# EAGLE board AudioBoard (EAGLE 6.2)
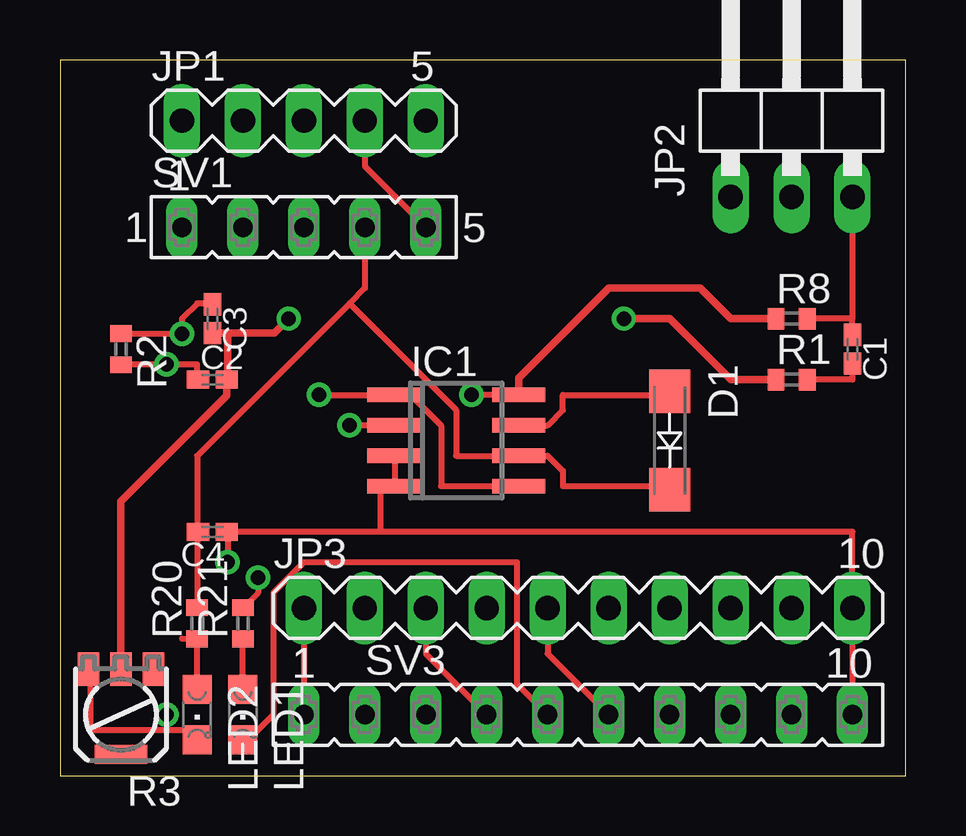
[diagram p0: board, top side]
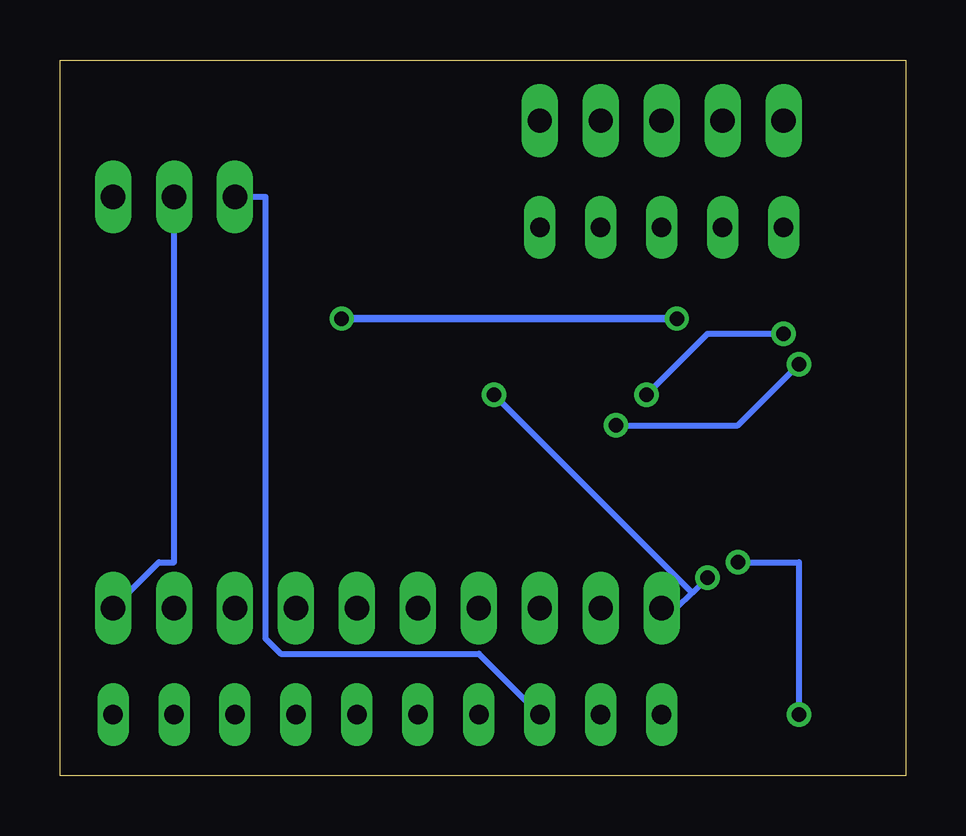
[diagram p1: board, bottom side, seen from below]

Size 35.23 x 29.84 mm. Coordinates in mm from the lower left corner, seen from the top.
Outline: 0,0 35.23,0 35.23,29.84 0,29.84 0,0
Copper layers (1*16): Top 0.035mm / dielectric 1.5mm / Bottom 0.035mm
Design rules: minimum track width 10mil, minimum drill 24mil, track to track 8mil, track to pad 8mil, pad to pad 8mil, via to via 8mil, smd to smd 8mil, copper to edge 40mil, drill to drill 8mil, minimum pad ring 10mil, minimum via ring 8mil, stop-mask expansion 4mil, vias tented up to drill 0mil, thermal gap 10mil

## Footprints (pad centres in the part's own frame; a part is rotated, then mirrored left to right if it is on the bottom)
C0402K = smd 0.925 x 0.74: 1 -0.6,0; 2 0.6,0
SMA-DO214AC = smd 1.8 x 1.7: A -2.05,0; K 2.05,0
SO08 = smd 0.6 x 2.2: 1 -1.905,-2.6; 2 -0.635,-2.6; 3 0.635,-2.6; 4 1.905,-2.6; 5 1.905,2.6; 6 0.635,2.6; 7 -0.635,2.6; 8 -1.905,2.6
MA05-1 = drill 1.016 long: 1 -5.08,0; 2 -2.54,0; 3 0,0; 4 2.54,0; 5 5.08,0
1X03/90 = drill 1.016 long: 1 -2.54,-3.81; 2 0,-3.81; 3 2.54,-3.81
MA10-1 = drill 1.016 long: 1 -11.43,0; 2 -8.89,0; 3 -6.35,0; 4 -3.81,0; 5 -1.27,0; 6 1.27,0; 7 3.81,0; 8 6.35,0; 9 8.89,0; 10 11.43,0
CHIPLED_0805 = smd 1.2 x 1.2: A 0,-1.05; C 0,1.05
R0402 = smd 0.7 x 0.9: 1 -0.65,0; 2 0.65,0
PC25 = smd 2.2 x 0.8: 4 0,1.65 | smd 0.9 x 1.4: A -1.35,-1.9; E 1.35,-1.9; S 0,-1.9
FE05-1 = drill 0.813 long: 1 -5.08,0; 2 -2.54,0; 3 0,0; 4 2.54,0; 5 5.08,0
FE10 = drill 0.813 long: 1 -11.43,0; 2 -8.89,0; 3 -6.35,0; 4 -3.81,0; 5 -1.27,0; 6 1.27,0; 7 3.81,0; 8 6.35,0; 9 8.89,0; 10 11.43,0

## Placement (x,y rotation side)
C1  [C0402K]  33.02,17.78 270 top
C2  [C0402K]  6.35,16.51 0 top
C3  [C0402K]  6.35,19.05 270 top
C4  [C0402K]  6.35,10.16 180 top
D1  GF1  [SMA-DO214AC]  25.4,13.97 270 top
IC1  LM4558D  [SO08]  16.51,13.97 270 top
JP1  [MA05-1]  10.16,27.3 0 top
JP2  [1X03/90]  30.48,27.94 0 top
JP3  [MA10-1]  21.59,6.98 0 top
LED1  [CHIPLED_0805]  7.62,2.54 180 top
LED2  [CHIPLED_0805]  5.72,2.54 180 top
R1  [R0402]  30.48,16.51 0 top
R2  [R0402]  2.54,17.78 270 top
R3  [PC25]  2.54,2.54 180 top
R8  [R0402]  30.48,19.05 0 top
R20  [R0402]  5.72,6.35 90 top
R21  [R0402]  7.62,6.35 90 top
SV1  [FE05-1]  10.16,22.86 0 top
SV3  [FE10]  21.59,2.54 0 top

## Library data of the parts
C1-C4 R1 R2 R8 R20 R21 = rcl
D1 = diode
IC1 = linear
JP1 JP3 = con-lstb; OC_FARNELL: unknown; OC_NEWARK: unknown
JP2 = pinhead
LED1 LED2 = led
R3 = pot-vitrohm; MF: CLAROSTAT; MPN: 308NPC25KS; OC_FARNELL: 1440998; OC_NEWARK: 03F7518
SV1 SV3 = con-lsta; OC_FARNELL: unknown; OC_NEWARK: unknown

## Nets
+3V3: IC1.8 JP3.1 R8.1 R21.2 SV3.1
GND: C4.1 IC1.3 IC1.4 JP2.2 JP3.10 LED2.C R3.E SV3.10
N$1: LED1.C SV3.5
N$2: LED1.A R21.1
N$3: LED2.A R20.1
N$4: JP3.5 SV3.6
N$5: C2.2 C3.2 R1.1 R3.S
N$6: C2.1 IC1.2 R2.2
N$7: C3.1 IC1.1 IC1.5 R2.1
N$8: C1.2 R1.2
N$9: JP3.3 SV3.4
N$10: C1.1 JP2.3 R8.2
N$11: C4.2 D1.K IC1.6 R20.2 SV1.4
N$12: JP1.4 SV1.5
N$13: D1.A IC1.7
N$14: JP2.1 SV3.3

## Tracks (layer width: path | path; a pad name or v marks a point on that pad's centre or on a via)
+3V3  (via drill 0.61)
  Top 0.254: JP3.1 SV3.1 | v8.25,8.25 8.25,7.62 7.62,6.98 R21.2 | IC1.8 v17.14,15.88 | 29.84,19.05 R8.1
  Top 0.305: R8.1 27.94,19.05 26.67,20.32 22.86,20.32 19.11,16.57 IC1.8
  Bottom 0.254: 8.89,7.62 9.52,6.98 JP3.1 | 8.89,7.62 v8.25,8.25 | v17.14,15.88 8.89,7.62
GND  (via drill 0.61)
  Top 0.254: SV3.10 JP3.10 33.02,10.16 13.34,10.16 | IC1.3 13.97,13.34 13.97,12.06 IC1.4 13.34,12.06 13.34,10.16 | 4.45,1.91 1.27,1.91 1.27,3.81 R3.E | 4.45,1.91 5.72,1.91 LED2.C | 13.34,10.16 6.99,10.16 | v4.45,2.54 4.45,1.91 | 6.99,10.16 v6.99,8.89 | 6.99,10.16 C4.1
  Bottom 0.254: v4.45,2.54 4.45,8.89 v6.99,8.89 | JP2.2 30.48,8.89 31.12,8.89 JP3.10
N$1
  Top 0.254: SV3.5 19.05,3.81 19.05,8.89 10.16,8.89 8.89,7.62 8.89,2.54 7.62,1.27 LED1.C
N$2
  Top 0.254: LED1.A R21.1 7.62,5.71
N$3
  Top 0.254: LED2.A R20.1 5.08,5.71
N$4
  Top 0.254: JP3.5 20.32,5.08 SV3.6
N$5  (via drill 0.6)
  Top 0.254: 29.84,16.51 R1.1
  Top 0.305: R1.1 27.94,16.51 25.4,19.05 v23.5,19.05 | v9.52,19.05 8.93,18.45 6.99,18.45 | 6.99,18.45 C3.2 | 6.95,16.48 C2.2 | C2.2 6.99,16.54 6.99,18.45 | R3.S 2.54,11.43 6.95,15.84 C2.2
  Bottom 0.305: v23.5,19.05 v9.52,19.05
N$6  (via drill 0.61)
  Top 0.254: R2.2 2.54,17.15 v4.45,17.15 5.72,17.15 5.72,16.51 C2.1 | IC1.2 v12.07,14.6
  Bottom 0.254: v4.45,17.15 6.99,14.6 v12.07,14.6
N$7  (via drill 0.61)
  Top 0.254: R2.1 2.54,18.41 v5.08,18.41 5.08,19.05 5.72,19.68 6.35,19.68 C3.1 | v10.8,15.88 IC1.1 14.61,15.88 15.88,14.6 15.88,12.06 IC1.5
  Bottom 0.254: v10.8,15.88 8.25,18.41 v5.08,18.41
N$8
  Top 0.254: C1.2 33.02,16.51 R1.2 31.12,16.51
N$9
  Top 0.254: SV3.4 15.24,5.08 JP3.3
N$10
  Top 0.254: 33.02,19.05 R8.2 31.12,19.05 | C1.1 33.02,19.05 | JP2.3 33.02,19.05
N$11
  Top 0.254: D1.K 25.4,12.06 20.96,12.06 20.96,12.7 20.32,13.34 IC1.6 16.51,13.34 16.51,15.24 12.07,19.68 | 5.72,10.16 R20.2 5.72,6.98 | 5.72,10.16 5.72,13.34 12.07,19.68 | 12.07,19.68 12.7,20.32 SV1.4 | 5.72,10.16 C4.2
N$12
  Top 0.254: SV1.5 12.7,25.4 JP1.4
N$13
  Top 0.254: IC1.7 20.32,14.6 20.96,15.24 20.96,15.88 25.4,15.88 D1.A
N$14
  Bottom 0.254: SV3.3 17.78,5.08 26.04,5.08 26.67,5.71 26.67,24.13 JP2.1